# Altium PCB GTU-V1.0-20160325 .PcbDoc (part 2 of 5)
Units mil, origin at the board's own origin, x right, y up, seen from the top; angles counter-clockwise.
Board outline 6299.21 x 4330.71 mil, 4 copper layers (Top Layer, POWER, GND, Bottom Layer); 208 components, 165 nets, 695 pads, 348 vias.
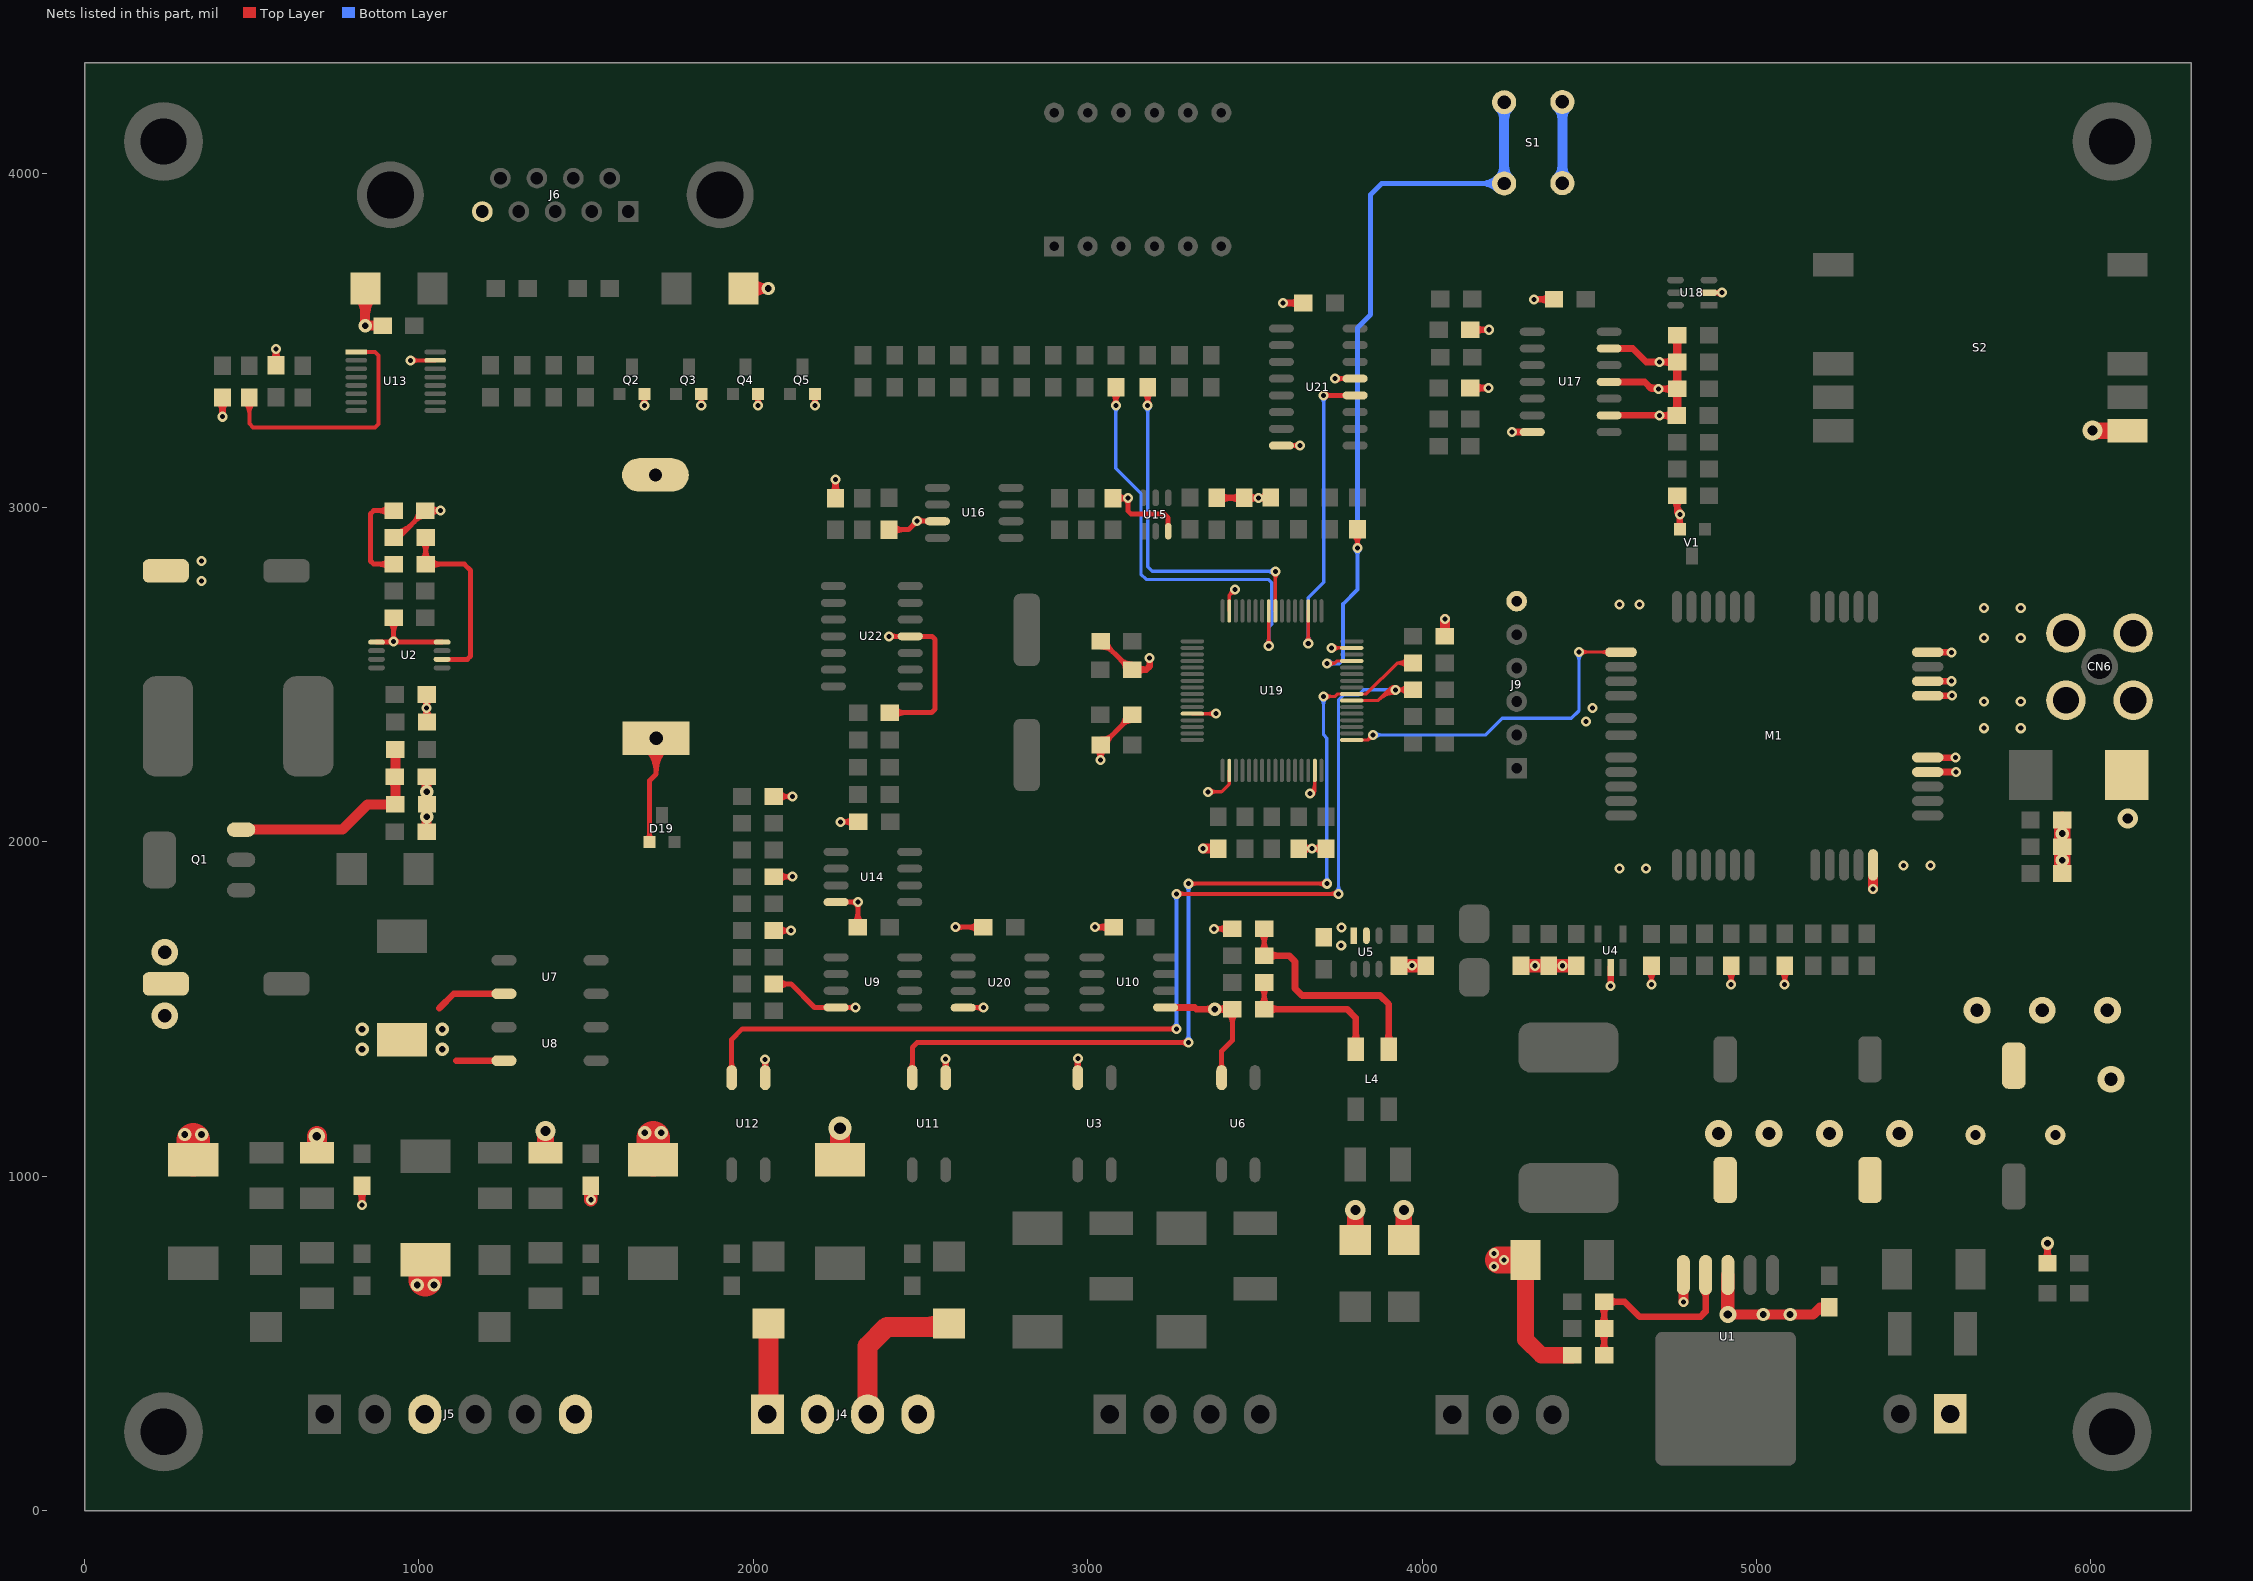
[diagram p4: the nets of this part, all layers, seen from the top]

## Via types
v1: diameter 30, hole 15, Top Layer to Bottom Layer, 262 vias
v2: diameter 40, hole 20, Top Layer to Bottom Layer, 36 vias
v3: diameter 40, hole 40, Top Layer to Bottom Layer, 16 vias
v4: diameter 80, hole 40, Top Layer to Bottom Layer, 12 vias
v5: diameter 60, hole 30, Top Layer to Bottom Layer, 11 vias
v6: diameter 50, hole 25, Top Layer to Bottom Layer, 10 vias
v7: diameter 70, hole 35, Top Layer to Bottom Layer, 1 vias

## Nets (pads, with @x,y where several pads share a name; then routed paths per layer and width w, separated by ;. In a path a pad name is that pad's centre, name@x,y a point inside that pad or via, vN(x,y) a via of type N, cw(c..) or ccw(c..) an arc to the next point about the centre after c; other vN are vias at no path point) (continued)
DIG3: R69.1 U19.56 | length 1460
  Top Layer w10: U19.56@3560.94,2690.87 v1(3560.94,2809.06) ; 3560.94,2784.91 cw(c3585.09,2784.91) 3568.02,2801.98 ccw(c3585.09,2784.91) 3560.94,2784.91 ; 3560.94,2784.91 ccw(c3536.8,2784.91) 3553.87,2801.98 cw(c3536.8,2784.91) 3560.94,2784.91
  Top Layer w15: v1(3179.21,3305.79) R69.1@3179.21,3360 ; v1@3179.21,3315.25 cw(c3221.46,3315.25) 3191.59,3345.13 ccw(c3221.46,3315.25) v1@3179.21,3315.25 ; v1@3179.21,3315.25 ccw(c3136.96,3315.25) 3166.84,3345.13 cw(c3136.96,3315.25) v1@3179.21,3315.25 ; 3179.21,3323.89 cw(c3161.11,3323.89) 3173.91,3311.09 ccw(c3161.11,3323.89) 3179.21,3323.89 ; 3179.21,3323.89 ccw(c3197.32,3323.89) 3184.52,3311.09 cw(c3197.32,3323.89) 3179.21,3323.89
  Bottom Layer w10: v1(3179.21,3305.79) 3179.21,2822.79 3192.94,2809.06 v1(3560.94,2809.06) ; 3179.21,3281.65 cw(c3203.35,3281.65) 3186.28,3298.72 ccw(c3203.35,3281.65) 3179.21,3281.65 ; 3179.21,3281.65 ccw(c3155.07,3281.65) 3172.14,3298.72 cw(c3155.07,3281.65) 3179.21,3281.65 ; 3536.8,2809.06 cw(c3536.8,2784.91) 3553.87,2801.98 ccw(c3536.8,2784.91) 3536.8,2809.06 ; 3536.8,2809.06 ccw(c3536.8,2833.2) 3553.87,2816.13 cw(c3536.8,2833.2) 3536.8,2809.06
DIG4: R74.1 U19.57 | length 1705.9
  Top Layer w10: v1(3541.26,2586.26) U19.57@3541.26,2690.87 ; 3541.26,2610.4 cw(c3517.12,2610.4) 3534.19,2593.33 ccw(c3517.12,2610.4) 3541.26,2610.4 ; 3541.26,2610.4 ccw(c3565.4,2610.4) 3548.33,2593.33 cw(c3565.4,2610.4) 3541.26,2610.4
  Top Layer w15: v1(3084.21,3305.79) R74.1@3084.21,3360 ; v1@3084.21,3315.25 cw(c3126.46,3315.25) 3096.59,3345.13 ccw(c3126.46,3315.25) v1@3084.21,3315.25 ; v1@3084.21,3315.25 ccw(c3041.96,3315.25) 3071.84,3345.13 cw(c3041.96,3315.25) v1@3084.21,3315.25 ; 3084.21,3323.89 cw(c3066.11,3323.89) 3078.91,3311.09 ccw(c3066.11,3323.89) 3084.21,3323.89 ; 3084.21,3323.89 ccw(c3102.32,3323.89) 3089.52,3311.09 cw(c3102.32,3323.89) 3084.21,3323.89
  Bottom Layer w10: v1(3084.21,3305.79) 3084.21,3116.79 3159,3042 3159,2801 3175,2785 3540,2785 3550,2775 3550,2651 3541.26,2642.26 v1(3541.26,2586.26) ; 3084.21,3281.65 cw(c3108.35,3281.65) 3091.28,3298.72 ccw(c3108.35,3281.65) 3084.21,3281.65 ; 3084.21,3281.65 ccw(c3060.07,3281.65) 3077.14,3298.72 cw(c3060.07,3281.65) 3084.21,3281.65 ; 3541.26,2610.4 cw(c3517.12,2610.4) 3534.19,2593.33 ccw(c3517.12,2610.4) 3541.26,2610.4 ; 3541.26,2610.4 ccw(c3565.4,2610.4) 3548.33,2593.33 cw(c3565.4,2610.4) 3541.26,2610.4
DIN1: D12.K J4.1 | length 310.2
  Top Layer w60: J4.1@2045.21,331.2 D12.K@2045.21,550 ; J4.1@2028.18,311.81 ccw(c1987.05,352.94) 2045.21,352.94 cw(c1987.05,352.94) J4.1@2028.18,311.81
DIN2: D11.K J4.3 | length 542.6
  Top Layer w60: J4.3@2341.76,327.76 2341.76,492.55 2399.21,550 D11.K@2585.21,550 ; 2522.36,550 ccw(c2522.36,620.36) 2572.11,570.61 cw(c2522.36,620.36) 2522.36,550
DK1: R23.1 U12.6 U19.39 | length 4461.8
  Top Layer w10: U19.39@3789.61,2422.83 3867.83,2422.83 3900,2455 ; R23.1@3972.6,2455 3900,2455 ; 3900,2455 cw(c3900,2440) 3912,2449 ccw(c3900,2440) 3900,2455 ; 3900,2455 ccw(c3900,2470) 3912,2461 cw(c3900,2470) 3900,2455 ; v1(3920,2455) ccw(c3920,2406.72) 3885.86,2440.86 cw(c3920,2406.72) v1(3920,2455) ; v1(3920,2455) ccw(c3910.15,2441.42) 3898.28,2453.28 cw(c3910.15,2441.42) v1(3920,2455) ; v1@3921.81,2455 cw(c3921.81,2406.72) 3955.96,2440.86 ccw(c3921.81,2406.72) v1@3921.81,2455 ; v1@3921.81,2455 ccw(c3921.81,2503.28) 3955.96,2469.14 cw(c3921.81,2503.28) v1@3921.81,2455 ; 3944.14,2455 cw(c3944.14,2479.14) 3927.07,2462.07 ccw(c3944.14,2479.14) 3944.14,2455 ; 3944.14,2455 ccw(c3944.14,2430.86) 3927.07,2447.93 cw(c3944.14,2430.86) 3944.14,2455 ; 3868.79,2423.79 cw(c3920,2372.57) 3920,2445 ccw(c3920,2372.57) 3868.79,2423.79 ; 3890,2445 cw(c3903.18,2431.82) 3914.13,2446.91 ccw(c3903.18,2431.82) 3890,2445 ; 3902.93,2457.93 cw(c3920,2440.86) 3920,2465 ccw(c3920,2440.86) 3902.93,2457.93
  Top Layer w12: v1(3265,1845) v1(3750,1845) ; 3286.73,1845 cw(c3286.73,1866.73) 3271.36,1851.36 ccw(c3286.73,1866.73) 3286.73,1845 ; 3286.73,1845 ccw(c3286.73,1823.27) 3271.36,1838.64 cw(c3286.73,1823.27) 3286.73,1845 ; 3728.27,1845 cw(c3728.27,1823.27) 3743.64,1838.64 ccw(c3728.27,1823.27) 3728.27,1845 ; 3728.27,1845 ccw(c3728.27,1866.73) 3743.64,1851.36 cw(c3728.27,1866.73) 3728.27,1845
  Top Layer w15: U12.6@1935.21,1295 1935.21,1409.21 1967,1441 v1(3265,1441) ; 1935.21,1337.02 cw(c1914.69,1337.02) 1929.2,1322.51 ccw(c1914.69,1337.02) 1935.21,1337.02 ; 1935.21,1337.02 ccw(c1955.73,1337.02) 1941.22,1322.51 cw(c1955.73,1337.02) 1935.21,1337.02 ; 3246.89,1441 cw(c3246.89,1422.89) 3259.7,1435.7 ccw(c3246.89,1422.89) 3246.89,1441 ; 3246.89,1441 ccw(c3246.89,1459.11) 3259.7,1446.3 cw(c3246.89,1459.11) 3246.89,1441
  Bottom Layer w10: v1(3750,1845) 3750,2425 3765,2440 3810,2440 3825,2455 v1(3920,2455) ; 3750,1869.14 cw(c3725.86,1869.14) 3742.93,1852.07 ccw(c3725.86,1869.14) 3750,1869.14 ; 3750,1869.14 ccw(c3774.14,1869.14) 3757.07,1852.07 cw(c3774.14,1869.14) 3750,1869.14 ; 3895.86,2455 cw(c3895.86,2430.86) 3912.93,2447.93 ccw(c3895.86,2430.86) 3895.86,2455 ; 3895.86,2455 ccw(c3895.86,2479.14) 3912.93,2462.07 cw(c3895.86,2479.14) 3895.86,2455
  Bottom Layer w12: v1(3265,1441) v1(3265,1845) ; 3265,1462.73 cw(c3243.27,1462.73) 3258.64,1447.36 ccw(c3243.27,1462.73) 3265,1462.73 ; 3265,1462.73 ccw(c3286.73,1462.73) 3271.36,1447.36 cw(c3286.73,1462.73) 3265,1462.73 ; 3265,1823.27 cw(c3286.73,1823.27) 3271.36,1838.64 ccw(c3286.73,1823.27) 3265,1823.27 ; 3265,1823.27 ccw(c3243.27,1823.27) 3258.64,1838.64 cw(c3243.27,1823.27) 3265,1823.27
DK2: R22.1 U11.6 U19.40 | length 3442.6
  Top Layer w10: v1(3705,2435) 3740,2435 3747.52,2442.52 3832.52,2442.52 3925,2535 ; R22.1@3972.6,2535 3925,2535 ; 3729.14,2435 cw(c3729.14,2459.14) 3712.07,2442.07 ccw(c3729.14,2459.14) 3729.14,2435 ; 3729.14,2435 ccw(c3729.14,2410.86) 3712.07,2427.93 cw(c3729.14,2410.86) 3729.14,2435 ; 3925,2535 cw(c3925,2494.16) 3955.27,2521.57 ccw(c3925,2494.16) 3925,2535 ; 3925,2535 ccw(c3925,2575.84) 3955.27,2548.43 cw(c3925,2575.84) 3925,2535
  Top Layer w12: v1(3301,1875) v1(3715,1875) ; 3322.73,1875 cw(c3322.73,1896.73) 3307.36,1881.36 ccw(c3322.73,1896.73) 3322.73,1875 ; 3322.73,1875 ccw(c3322.73,1853.27) 3307.36,1868.64 cw(c3322.73,1853.27) 3322.73,1875 ; 3693.27,1875 cw(c3693.27,1853.27) 3708.64,1868.64 ccw(c3693.27,1853.27) 3693.27,1875 ; 3693.27,1875 ccw(c3693.27,1896.73) 3708.64,1881.36 cw(c3693.27,1896.73) 3693.27,1875
  Top Layer w15: U11.6@2475.21,1295 2475.21,1385.21 2490,1400 v1(3301,1400) ; 2475.21,1337.02 cw(c2454.69,1337.02) 2469.2,1322.51 ccw(c2454.69,1337.02) 2475.21,1337.02 ; 2475.21,1337.02 ccw(c2495.73,1337.02) 2481.22,1322.51 cw(c2495.73,1337.02) 2475.21,1337.02 ; 3282.89,1400 cw(c3282.89,1381.89) 3295.7,1394.7 ccw(c3282.89,1381.89) 3282.89,1400 ; 3282.89,1400 ccw(c3282.89,1418.11) 3295.7,1405.3 cw(c3282.89,1418.11) 3282.89,1400
  Bottom Layer w10: v1(3705,2435) 3705,2320 3715,2310 v1(3715,1875) ; 3705,2410.86 cw(c3729.14,2410.86) 3712.07,2427.93 ccw(c3729.14,2410.86) 3705,2410.86 ; 3705,2410.86 ccw(c3680.86,2410.86) 3697.93,2427.93 cw(c3680.86,2410.86) 3705,2410.86 ; 3715,1899.14 cw(c3690.86,1899.14) 3707.93,1882.07 ccw(c3690.86,1899.14) 3715,1899.14 ; 3715,1899.14 ccw(c3739.14,1899.14) 3722.07,1882.07 cw(c3739.14,1899.14) 3715,1899.14
  Bottom Layer w12: v1(3301,1400) v1(3301,1875) ; 3301,1421.73 cw(c3279.27,1421.73) 3294.64,1406.36 ccw(c3279.27,1421.73) 3301,1421.73 ; 3301,1421.73 ccw(c3322.73,1421.73) 3307.36,1406.36 cw(c3322.73,1421.73) 3301,1421.73 ; 3301,1853.27 cw(c3322.73,1853.27) 3307.36,1868.64 ccw(c3322.73,1853.27) 3301,1853.27 ; 3301,1853.27 ccw(c3279.27,1853.27) 3294.64,1868.64 cw(c3279.27,1853.27) 3301,1853.27
DLC: U19.51 U21.12 | length 1237.6
  Top Layer w10: v1(3659.37,2593) U19.51@3659.37,2690.87 ; 3659.37,2617.14 cw(c3635.23,2617.14) 3652.3,2600.07 ccw(c3635.23,2617.14) 3659.37,2617.14 ; 3659.37,2617.14 ccw(c3683.51,2617.14) 3666.44,2600.07 cw(c3683.51,2617.14) 3659.37,2617.14
  Top Layer w15: v1(3705.39,3335.39) U21.12@3799.21,3335.39 ; 3723.49,3335.39 cw(c3723.49,3353.49) 3710.69,3340.69 ccw(c3723.49,3353.49) 3723.49,3335.39 ; 3723.49,3335.39 ccw(c3723.49,3317.28) 3710.69,3330.08 cw(c3723.49,3317.28) 3723.49,3335.39
  Bottom Layer w10: v1(3659.37,2593) 3659.37,2730.37 3705.39,2776.39 v1(3705.39,3335.39) ; 3659.37,2617.14 cw(c3635.23,2617.14) 3652.3,2600.07 ccw(c3635.23,2617.14) 3659.37,2617.14 ; 3659.37,2617.14 ccw(c3683.51,2617.14) 3666.44,2600.07 cw(c3683.51,2617.14) 3659.37,2617.14 ; 3705.39,3311.24 cw(c3729.53,3311.24) 3712.46,3328.31 ccw(c3729.53,3311.24) 3705.39,3311.24 ; 3705.39,3311.24 ccw(c3681.24,3311.24) 3698.31,3328.31 cw(c3681.24,3311.24) 3705.39,3311.24
GND: BT1.2 C2.2 C3.2 C5.2 C6.2 C7.2 C8.2 C9.2 C10.2 C11.2 C12.2 C13.2 C14.2 C15.2 C16.2 C17.2 C18.2 C19.1 C20.2 C22.1 C23.1 C25.2 C26.2 C27.2 C28.2 C29.2 C30.2 C31.2 C32.2 C33.2 C34.1 C35.2 C36.2 C37.2 C38.2 C39.2 C40.2 C41.2 C42.2 C43.2 C44.2 C45.2 C46.2 C47.2 C48.2 C49.2 CN6.2 CN6.3 CN6.4 CN6.5 D2.A D4.A D7.A D8.A D9.A D10.A D13.A D14.A D15.A D18.A EC1.2 EC2.2 EC3.2 EC4.2 EC5.2 EC6.2 J1.1 J4.2 J4.4 J5.3 J5.6 J6.5 J9.6 LED1.2 M1.31 M1.35 M1.36 M1.37 M1.38 M1.40 Q2.2 Q3.2 Q4.2 Q5.2 R5.2 R6.1 R7.1 R8.1 R9.1 R11.1 R18.1 R32.1 R40.1 R41.1 R49.1 R50.2 R54.1 R55.2 R58.2 R59.2 R60.1 R61.2 S1.1 S1.4 S2.4 U1.3 U1.5 U2.4 U2.5 U3.3 U4.2 U5.1 U5.2 U6.3 U7.3 U8.3 U9.4 U10.5 U11.4 U12.4 U13.15 U14.4 U15.3 U16.3 U17.7 U17.9 U17.11 U17.13 U18.2 U19.12 U19.18 U19.31 U19.47 U19.63 U20.4 U21.8 U21.13 U22.11 V1.2 | length 19976.6
  Top Layer w10: U19.12@3312.6,2383.46 v1(3383.46,2383.46) ; v1(3360,2150) 3400,2150 3423.15,2173.15 U19.18@3423.15,2213.86 ; U19.63@3423.15,2690.87 3423.15,2738.15 ; v1(3440,2755) 3423.15,2738.15 ; v1@3672.07,2137.93 ccw(c3655.21,2154.79) 3679.06,2154.79 ; U19.31@3679.06,2178.93 cw(c3631.07,2178.93) v1(3665,2145) 3679.06,2159.06 U19.31@3679.06,2213.86 ; v1@3720.31,2580.31 U19.47@3789.61,2580.31 ; 3359.32,2383.46 cw(c3359.32,2359.32) 3376.39,2376.39 ccw(c3359.32,2359.32) 3359.32,2383.46 ; 3359.32,2383.46 ccw(c3359.32,2407.61) 3376.39,2390.54 cw(c3359.32,2407.61) 3359.32,2383.46 ; 3384.14,2150 cw(c3384.14,2174.14) 3367.07,2157.07 ccw(c3384.14,2174.14) 3384.14,2150 ; 3384.14,2150 ccw(c3384.14,2125.86) 3367.07,2142.93 cw(c3384.14,2125.86) 3384.14,2150 ; 3423.15,2738.15 cw(c3439.69,2721.61) 3439.91,2745 ccw(c3439.69,2721.61) 3423.15,2738.15 ; 3423.15,2738.15 ccw(c3406.61,2754.69) 3430,2754.91 cw(c3406.61,2754.69) 3423.15,2738.15 ; 3753.46,2580.31 cw(c3753.46,2604.46) 3736.39,2587.39 ccw(c3753.46,2604.46) 3753.46,2580.31 ; 3753.46,2580.31 ccw(c3753.46,2556.17) 3736.39,2573.24 cw(c3753.46,2556.17) 3753.46,2580.31
  Top Layer w12: v1(974.21,3440) U13.15@1048.71,3440 ; 995.94,3440 cw(c995.94,3461.73) 980.58,3446.36 ccw(c995.94,3461.73) 995.94,3440 ; 995.94,3440 ccw(c995.94,3418.27) 980.58,3433.64 cw(c995.94,3418.27) 995.94,3440
  Top Layer w15: U2.5@873.21,2597.39 U2.4@1069.21,2597.39 ; R6.1@924.21,2670.61 v1(924.21,2599.39) v1@926.21,2597.39 ; C6.2@925.21,2910.61 939.21,2910.61 R9.1@1019.21,2990.61 ; v1(1674.21,3305) Q2.2@1674.21,3340 ; v1(1844.21,3305) Q3.2@1844.21,3340 ; v1(2014.21,3305) Q4.2@2014.21,3340 ; R18.1@2061.21,1575 2113,1575 2183,1505 v1(2306,1505) ; C16.2@2061.21,1735 v1(2112,1735) ; C26.2@2061.21,1896 v1(2117,1896) ; C28.2@2061.21,2136 v1(2117,2136) ; v1(2184.21,3305) Q5.2@2184.21,3340 ; U14.4@2247.6,1820 v1(2312.6,1820) C14.2@2312.6,1745 ; v1(2260,2060) C20.2@2314.21,2060 ; v1(2405,2615) 2534,2615 2543,2606 2543,2397 2532.67,2386.67 C49.2@2408.21,2386.67 ; C33.2@2405.6,2934 2464,2934 v1@2489,2959 ; v1@2482.5,2960 cw(c2464.39,2960) 2477.2,2947.2 cw(c2490,2934.39) v1@2490,2952.5 ; v1(2490,2960) 2549.6,2960 U16.3@2550.6,2959 ; v1@2495.3,2954.7 cw(c2508.11,2941.89) 2508.11,2960 cw(c2508.11,2978.11) v1@2495.3,2965.3 ; 2511.82,2960 cw(c2511.82,2945.72) U16.3@2521.92,2955.82 ; v1(2605,1745) C39.2@2687.6,1745 ; U20.4@2627.6,1504.22 v1@2689.22,1504.22 ; C45.2@3038.6,2285 C48.2@3118.6,2365 ; C44.2@3038.6,2605 C47.2@3118.6,2525 ; R41.1@3075.6,3028 v1(3120,3028) 3120,2990 3130,2980 3230,2980 3240.6,2969.4 U15.3@3240.6,2929 ; C48.2@3118.6,2370 C48.2@3132.6,2370 ; v1(3377,1740) C18.2@3432.6,1740 ; U6.3@3400.21,1295 3400.21,1374.21 3432.6,1406.6 C17.2@3432.6,1500 ; R60.1@3546.6,3029 R60.1@3547.6,3030 ; U21.8@3579.21,3185.39 v1(3634.61,3185.39) ; v1(3740,3385.39) U21.13@3799.21,3385.39 ; v1(4685.83,1573.56) R11.1@4685.83,1629.78 ; U18.2@4857.6,3642.5 v1(4896.71,3642.5) ; v1(4924.21,1573.79) R54.1@4924.21,1630 ; v1(5084.21,1573.79) R50.2@5084.21,1630 ; v1@918.91,2604.69 ccw(c906.11,2617.49) 924.21,2617.49 ; v1@918.91,2604.69 cw(c901.28,2622.32) 901.28,2597.39 ccw(c901.28,2622.32) v1@918.91,2604.69 ; v1@918.91,2604.69 ccw(c906.11,2617.49) 924.21,2617.49 ; 924.21,2617.49 ccw(c942.32,2617.49) v1@929.52,2604.69 ; 924.21,2617.49 ccw(c942.32,2617.49) v1@929.52,2604.69 ; 924.21,2628.37 cw(c966.46,2628.37) 936.59,2658.24 ccw(c966.46,2628.37) 924.21,2628.37 ; 924.21,2628.37 ccw(c881.96,2628.37) 911.84,2658.24 cw(c881.96,2628.37) 924.21,2628.37 ; v1@929.52,2604.69 ccw(c947.15,2622.32) 947.15,2597.39 cw(c947.15,2622.32) v1@929.52,2604.69 ; v1@1674.21,3314.65 cw(c1699.56,3314.65) 1681.64,3332.58 ccw(c1699.56,3314.65) v1@1674.21,3314.65 ; v1@1674.21,3314.65 ccw(c1648.86,3314.65) 1666.79,3332.58 cw(c1648.86,3314.65) v1@1674.21,3314.65 ; Q2.2@1674.21,3323.11 cw(c1656.11,3323.11) 1668.91,3310.3 ccw(c1656.11,3323.11) Q2.2@1674.21,3323.11 ; Q2.2@1674.21,3323.11 ccw(c1692.32,3323.11) 1679.52,3310.3 cw(c1692.32,3323.11) Q2.2@1674.21,3323.11 ; v1@1844.21,3314.65 cw(c1869.56,3314.65) 1851.64,3332.58 ccw(c1869.56,3314.65) v1@1844.21,3314.65 ; v1@1844.21,3314.65 ccw(c1818.86,3314.65) 1836.79,3332.58 cw(c1818.86,3314.65) v1@1844.21,3314.65 ; Q3.2@1844.21,3323.11 cw(c1826.11,3323.11) 1838.91,3310.3 ccw(c1826.11,3323.11) Q3.2@1844.21,3323.11 ; Q3.2@1844.21,3323.11 ccw(c1862.32,3323.11) 1849.52,3310.3 cw(c1862.32,3323.11) Q3.2@1844.21,3323.11 ; v1@2014.21,3314.65 cw(c2039.56,3314.65) 2021.64,3332.58 ccw(c2039.56,3314.65) v1@2014.21,3314.65 ; v1@2014.21,3314.65 ccw(c1988.86,3314.65) 2006.79,3332.58 cw(c1988.86,3314.65) v1@2014.21,3314.65 ; Q4.2@2014.21,3323.11 cw(c1996.11,3323.11) 2008.91,3310.3 ccw(c1996.11,3323.11) Q4.2@2014.21,3323.11 ; Q4.2@2014.21,3323.11 ccw(c2032.32,3323.11) 2019.52,3310.3 cw(c2032.32,3323.11) Q4.2@2014.21,3323.11 ; 2093.89,1735 cw(c2093.89,1716.89) 2106.7,1729.7 ccw(c2093.89,1716.89) 2093.89,1735 ; 2093.89,1735 ccw(c2093.89,1753.11) 2106.7,1740.3 cw(c2093.89,1753.11) 2093.89,1735 ; 2098.89,1896 cw(c2098.89,1877.89) 2111.7,1890.7 ccw(c2098.89,1877.89) 2098.89,1896 ; 2098.89,1896 ccw(c2098.89,1914.11) 2111.7,1901.3 cw(c2098.89,1914.11) 2098.89,1896 ; 2098.89,2136 cw(c2098.89,2117.89) 2111.7,2130.7 ccw(c2098.89,2117.89) 2098.89,2136 ; 2098.89,2136 ccw(c2098.89,2154.11) 2111.7,2141.3 cw(c2098.89,2154.11) 2098.89,2136 ; 2105.96,1575 cw(c2105.96,1617.25) 2076.09,1587.37 ccw(c2105.96,1617.25) 2105.96,1575 ; 2105.96,1575 ccw(c2105.96,1532.75) 2076.09,1562.63 cw(c2105.96,1532.75) 2105.96,1575 ; v1@2105.96,1735 cw(c2105.96,1777.25) 2076.09,1747.37 ccw(c2105.96,1777.25) v1@2105.96,1735 ; v1@2105.96,1735 ccw(c2105.96,1692.75) 2076.09,1722.63 cw(c2105.96,1692.75) v1@2105.96,1735 ; v1@2105.96,1896 cw(c2105.96,1938.25) 2076.09,1908.37 ccw(c2105.96,1938.25) v1@2105.96,1896 ; v1@2105.96,1896 ccw(c2105.96,1853.75) 2076.09,1883.63 cw(c2105.96,1853.75) v1@2105.96,1896 ; v1@2105.96,2136 cw(c2105.96,2178.25) 2076.09,2148.37 ccw(c2105.96,2178.25) v1@2105.96,2136 ; v1@2105.96,2136 ccw(c2105.96,2093.75) 2076.09,2123.63 cw(c2105.96,2093.75) v1@2105.96,2136 ; v1@2184.21,3314.65 cw(c2209.56,3314.65) 2191.64,3332.58 ccw(c2209.56,3314.65) v1@2184.21,3314.65 ; v1@2184.21,3314.65 ccw(c2158.86,3314.65) 2176.79,3332.58 cw(c2158.86,3314.65) v1@2184.21,3314.65 ; Q5.2@2184.21,3323.11 cw(c2166.11,3323.11) 2178.91,3310.3 ccw(c2166.11,3323.11) Q5.2@2184.21,3323.11 ; Q5.2@2184.21,3323.11 ccw(c2202.32,3323.11) 2189.52,3310.3 cw(c2202.32,3323.11) Q5.2@2184.21,3323.11 ; v1@2269.46,2060 cw(c2269.46,2017.75) 2299.34,2047.63 ccw(c2269.46,2017.75) v1@2269.46,2060 ; v1@2269.46,2060 ccw(c2269.46,2102.25) 2299.34,2072.37 cw(c2269.46,2102.25) v1@2269.46,2060 ; 2278.11,2060 cw(c2278.11,2078.11) 2265.3,2065.3 ccw(c2278.11,2078.11) 2278.11,2060 ; 2278.11,2060 ccw(c2278.11,2041.89) 2265.3,2054.7 cw(c2278.11,2041.89) 2278.11,2060 ; 2287.89,1505 cw(c2287.89,1486.89) 2300.7,1499.7 ccw(c2287.89,1486.89) 2287.89,1505 ; 2287.89,1505 ccw(c2287.89,1523.11) 2300.7,1510.3 cw(c2287.89,1523.11) 2287.89,1505 ; 2294.49,1820 cw(c2294.49,1801.89) v1@2307.3,1814.7 ; 2294.49,1820 ccw(c2294.49,1838.11) 2307.3,1825.3 cw(c2294.49,1838.11) 2294.49,1820 ; 2294.49,1820 cw(c2294.49,1801.89) v1@2307.3,1814.7 ; v1@2307.3,1814.7 cw(c2294.49,1801.89) 2312.6,1801.89 ; v1@2307.3,1814.7 cw(c2294.49,1801.89) 2312.6,1801.89 ; 2312.6,1787.25 cw(c2270.35,1787.25) 2300.22,1757.37 ccw(c2270.35,1787.25) 2312.6,1787.25 ; 2312.6,1787.25 ccw(c2354.85,1787.25) 2324.97,1757.37 cw(c2354.85,1787.25) 2312.6,1787.25 ; 2312.6,1801.89 cw(c2330.7,1801.89) 2317.9,1814.7 ccw(c2330.7,1801.89) 2312.6,1801.89 ; 2423.11,2615 cw(c2423.11,2633.11) 2410.3,2620.3 ccw(c2423.11,2633.11) 2423.11,2615 ; 2423.11,2615 ccw(c2423.11,2596.89) 2410.3,2609.7 cw(c2423.11,2596.89) 2423.11,2615 ; 2447.85,2934 cw(c2447.85,2976.25) 2417.97,2946.37 ccw(c2447.85,2976.25) 2447.85,2934 ; 2447.85,2934 ccw(c2447.85,2891.75) 2417.97,2921.63 cw(c2447.85,2891.75) 2447.85,2934 ; 2452.96,2386.67 cw(c2452.96,2428.92) 2423.09,2399.04 ccw(c2452.96,2428.92) 2452.96,2386.67 ; 2452.96,2386.67 ccw(c2452.96,2344.42) 2423.09,2374.29 cw(c2452.96,2344.42) 2452.96,2386.67 ; 2623.11,1745 cw(c2623.11,1763.11) 2610.3,1750.3 ccw(c2623.11,1763.11) 2623.11,1745 ; 2623.11,1745 ccw(c2623.11,1726.89) 2610.3,1739.7 cw(c2623.11,1726.89) 2623.11,1745 ; 2642.85,1745 cw(c2642.85,1702.75) 2672.72,1732.63 ccw(c2642.85,1702.75) 2642.85,1745 ; 2642.85,1745 ccw(c2642.85,1787.25) 2672.72,1757.37 cw(c2642.85,1787.25) 2642.85,1745 ; 2670.11,1504.22 cw(c2670.11,1486.11) 2682.92,1498.92 ccw(c2670.11,1486.11) 2670.11,1504.22 ; 2670.11,1504.22 ccw(c2670.11,1522.33) 2682.92,1509.52 cw(c2670.11,1522.33) 2670.11,1504.22 ; 3101.89,3028 cw(c3101.89,3009.89) v1@3114.7,3022.7 ; 3101.89,3028 ccw(c3101.89,3046.11) 3114.7,3033.3 cw(c3101.89,3046.11) 3101.89,3028 ; 3101.89,3028 cw(c3101.89,3009.89) v1@3114.7,3022.7 ; v1@3114.7,3022.7 cw(c3101.89,3009.89) 3120,3009.89 ; v1@3114.7,3022.7 cw(c3101.89,3009.89) 3120,3009.89 ; v1@3117.85,3028 cw(c3117.85,3070.25) 3087.97,3040.37 ccw(c3117.85,3070.25) v1@3117.85,3028 ; v1@3117.85,3028 ccw(c3117.85,2985.75) 3087.97,3015.63 cw(c3117.85,2985.75) v1@3117.85,3028 ; 3120,3009.89 cw(c3138.11,3009.89) 3125.3,3022.7 ccw(c3138.11,3009.89) 3120,3009.89 ; v1@3387.85,1740 cw(c3387.85,1697.75) 3417.72,1727.63 ccw(c3387.85,1697.75) v1@3387.85,1740 ; v1@3387.85,1740 ccw(c3387.85,1782.25) 3417.72,1752.37 cw(c3387.85,1782.25) v1@3387.85,1740 ; 3395.11,1740 cw(c3395.11,1758.11) 3382.3,1745.3 ccw(c3395.11,1758.11) 3395.11,1740 ; 3395.11,1740 ccw(c3395.11,1721.89) 3382.3,1734.7 cw(c3395.11,1721.89) 3395.11,1740 ; 3400.21,1337.02 cw(c3379.69,1337.02) 3394.2,1322.51 ccw(c3379.69,1337.02) 3400.21,1337.02 ; 3400.21,1337.02 ccw(c3420.73,1337.02) 3406.22,1322.51 cw(c3420.73,1337.02) 3400.21,1337.02 ; 3432.6,1457.75 cw(c3474.85,1457.75) 3444.97,1487.63 ccw(c3474.85,1457.75) 3432.6,1457.75 ; 3432.6,1457.75 ccw(c3390.35,1457.75) 3420.22,1487.63 cw(c3390.35,1457.75) 3432.6,1457.75 ; U21.8@3616.51,3185.39 cw(c3616.51,3167.28) 3629.31,3180.08 ccw(c3616.51,3167.28) U21.8@3616.51,3185.39 ; U21.8@3616.51,3185.39 ccw(c3616.51,3203.49) 3629.31,3190.69 cw(c3616.51,3203.49) U21.8@3616.51,3185.39 ; 3758.11,3385.39 cw(c3758.11,3403.49) 3745.3,3390.69 ccw(c3758.11,3403.49) 3758.11,3385.39 ; 3758.11,3385.39 ccw(c3758.11,3367.28) 3745.3,3380.08 cw(c3758.11,3367.28) 3758.11,3385.39 ; v1@4685.83,1585.03 cw(c4728.08,1585.03) 4698.2,1614.9 ccw(c4728.08,1585.03) v1@4685.83,1585.03 ; v1@4685.83,1585.03 ccw(c4643.58,1585.03) 4673.45,1614.9 cw(c4643.58,1585.03) v1@4685.83,1585.03 ; 4685.83,1591.67 cw(c4667.72,1591.67) 4680.52,1578.87 ccw(c4667.72,1591.67) 4685.83,1591.67 ; 4685.83,1591.67 ccw(c4703.93,1591.67) 4691.13,1578.87 cw(c4703.93,1591.67) 4685.83,1591.67 ; U18.2@4878.61,3642.5 cw(c4878.61,3624.39) 4891.41,3637.2 ccw(c4878.61,3624.39) U18.2@4878.61,3642.5 ; U18.2@4878.61,3642.5 ccw(c4878.61,3660.61) 4891.41,3647.8 cw(c4878.61,3660.61) U18.2@4878.61,3642.5 ; v1@4924.21,1585.25 cw(c4966.46,1585.25) 4936.59,1615.13 ccw(c4966.46,1585.25) v1@4924.21,1585.25 ; v1@4924.21,1585.25 ccw(c4881.96,1585.25) 4911.84,1615.13 cw(c4881.96,1585.25) v1@4924.21,1585.25 ; 4924.21,1591.89 cw(c4906.11,1591.89) 4918.91,1579.09 ccw(c4906.11,1591.89) 4924.21,1591.89 ; 4924.21,1591.89 ccw(c4942.32,1591.89) 4929.52,1579.09 cw(c4942.32,1591.89) 4924.21,1591.89 ; v1@5084.21,1585.25 cw(c5126.46,1585.25) 5096.59,1615.13 ccw(c5126.46,1585.25) v1@5084.21,1585.25 ; v1@5084.21,1585.25 ccw(c5041.96,1585.25) 5071.84,1615.13 cw(c5041.96,1585.25) v1@5084.21,1585.25 ; 5084.21,1591.89 cw(c5066.11,1591.89) 5078.91,1579.09 ccw(c5066.11,1591.89) 5084.21,1591.89 ; 5084.21,1591.89 ccw(c5102.32,1591.89) 5089.52,1579.09 cw(c5102.32,1591.89) 5084.21,1591.89 ; C6.2@927.71,2913.11 ccw(c927.71,2946.91) 951.61,2923.01 cw(c927.71,2946.91) C6.2@927.71,2913.11 ; C6.2@927.71,2928.11 ccw(c927.71,2998.13) 977.22,2948.62 cw(c927.71,2998.13) C6.2@927.71,2928.11 ; 985.07,2956.47 ccw(c950.93,2990.61) 999.21,2990.61 cw(c950.93,2990.61) 985.07,2956.47 ; 991.11,2962.51 cw(c1016.71,2936.9) 1016.71,2973.11 ccw(c1016.71,2936.9) 991.11,2962.51 ; C45.2@3041.1,2307.5 ccw(c3041.1,2355.78) 3075.24,2321.64 cw(c3041.1,2355.78) C45.2@3041.1,2307.5 ; C44.2@3041.1,2582.5 cw(c3041.1,2534.22) 3075.24,2568.36 ccw(c3041.1,2534.22) C44.2@3041.1,2582.5 ; C45.2@3058.6,2290 cw(c3094.81,2290) 3069.21,2315.61 ccw(c3094.81,2290) C45.2@3058.6,2290 ; C44.2@3058.6,2600 ccw(c3094.81,2600) 3069.21,2574.39 cw(c3094.81,2600) C44.2@3058.6,2600 ; 3097.66,2545.94 ccw(c3130.1,2578.37) 3130.1,2532.5 cw(c3130.1,2578.37) 3097.66,2545.94 ; 3097.75,2344.15 ccw(c3061.9,2380) 3112.6,2380 cw(c3061.9,2380) 3097.75,2344.15 ; 3101.28,2542.31 cw(c3073.97,2515) 3112.6,2515 ccw(c3073.97,2515) 3101.28,2542.31 ; 3106.2,2352.6 cw(c3130.1,2328.7) 3130.1,2362.5 ccw(c3130.1,2328.7) 3106.2,2352.6
  Top Layer w20: v1(412.71,3271.5) C22.1@412.71,3329 ; C23.1@572.71,3425 v1(572.71,3473.5) ; v1(830,914.21) C25.2@830,972 ; R9.1@1019.21,2990.61 v1(1065,2990.61) ; C2.2@1023.21,2440.61 1023.21,2359.61 R7.1@1024.21,2358.61 ; 1061,1503 1104,1546 U7.3@1254.21,1546 ; 1112,1346 U8.3@1254.21,1346 ; U12.4@2035.21,1295 v1(2035.21,1350) ; R49.1@2245.6,3028 v1(2245.6,3084.4) ; U11.4@2575.21,1295 v1(2575.21,1351) ; U3.3@2970.21,1295 v1(2970.21,1353) ; v1@3020,1745 C15.2@3077.6,1745 ; v1(3038.6,2245.6) C45.2@3038.6,2290 ; C47.2@3132.6,2515 3175,2515 3185,2525 v1(3185,2550) ; U10.5@3232.6,1505 3320,1505 3325,1500 C17.2@3432.6,1500 C17.2@3427.6,1505 ; C32.2@3385.6,3029 R60.1@3546.6,3029 ; v1(3583.39,3611.61) C46.2@3644.21,3611.61 ; R61.2@3631.35,1980 C41.2@3712.6,1980 ; R58.2@4144.21,3357.61 v1(4198.21,3357.61) ; R59.2@4144.21,3531.61 v1(4199.21,3531.61) ; v1(4268.6,3225.61) U17.7@4329.21,3225.61 ; v1(4334.6,3622.61) C38.2@4394.21,3622.61 ; U17.9@4559.21,3275.61 4708.6,3275.61 v1(4709.21,3275) C34.1@4761.6,3275 C34.1@4762.6,3276 ; U17.11@4559.21,3375.61 4665.6,3375.61 4686.21,3355 C37.2@4762.6,3355 ; U17.13@4559.21,3475.61 4629.6,3475.61 4670.21,3435 C35.2@4762.6,3435 ; v1(4563.83,1569.17) U4.2@4563.83,1624.78 ; 4762.6,3010 ccw(c4801.98,3010) v1@4774.13,2982.15 ; R55.2@4762.6,3035 4762.6,2986.61 v1(4770.6,2978.61) V1.2@4770.6,2935 ; U1.5@4780.93,705 U1.5@4781.21,704.72 ; M1.35@5511.98,2208.91 5595.91,2208.91 v1(5596,2209) ; M1.36@5511.98,2252.21 5594.43,2252.21 v1(5595.21,2253) ; M1.37@5511.98,2437.25 v1(5584.21,2437.25) ; M1.38@5511.98,2480.56 v1(5583.21,2480.56) ; M1.40@5511.98,2567.17 v1(5582.21,2567.17) ; LED1.2@5870,740 v2(5870,800) ; 412.71,3290.29 cw(c448.93,3290.29) 423.32,3315.89 ccw(c448.93,3290.29) 412.71,3290.29 ; 412.71,3290.29 ccw(c376.5,3290.29) 402.11,3315.89 cw(c376.5,3290.29) 412.71,3290.29 ; v1@572.71,3463.71 cw(c536.5,3463.71) 562.11,3438.11 ccw(c536.5,3463.71) v1@572.71,3463.71 ; v1@572.71,3463.71 ccw(c608.93,3463.71) 583.32,3438.11 cw(c608.93,3463.71) v1@572.71,3463.71 ; 830,933.29 cw(c866.21,933.29) 840.61,958.89 ccw(c866.21,933.29) 830,933.29 ; 830,933.29 ccw(c793.79,933.29) 819.39,958.89 cw(c793.79,933.29) 830,933.29 ; v1@1023.21,2404.4 cw(c1059.43,2404.4) 1033.82,2430.01 ccw(c1059.43,2404.4) v1@1023.21,2404.4 ; v1@1023.21,2404.4 ccw(c987,2404.4) 1012.61,2430.01 cw(c987,2404.4) v1@1023.21,2404.4 ; v1@1057.93,2990.61 cw(c1057.93,3026.83) 1032.32,3001.22 ccw(c1057.93,3026.83) v1@1057.93,2990.61 ; v1@1057.93,2990.61 ccw(c1057.93,2954.4) 1032.32,2980.01 cw(c1057.93,2954.4) v1@1057.93,2990.61 ; 2245.6,3066.71 cw(c2209.39,3066.71) 2234.99,3041.11 ccw(c2209.39,3066.71) 2245.6,3066.71 ; 2245.6,3066.71 ccw(c2281.81,3066.71) 2256.21,3041.11 cw(c2281.81,3066.71) 2245.6,3066.71 ; v1@3038.6,2253.79 cw(c3074.81,2253.79) 3049.21,2279.39 ccw(c3074.81,2253.79) v1@3038.6,2253.79 ; v1@3038.6,2253.79 ccw(c3002.39,2253.79) 3027.99,2279.39 cw(c3002.39,2253.79) v1@3038.6,2253.79 ; 3038.89,1745 cw(c3038.89,1708.79) 3064.49,1734.39 ccw(c3038.89,1708.79) 3038.89,1745 ; 3038.89,1745 ccw(c3038.89,1781.21) 3064.49,1755.61 cw(c3038.89,1781.21) 3038.89,1745 ; 3171.31,2515 cw(c3171.31,2551.21) 3145.71,2525.61 ccw(c3171.31,2551.21) 3171.31,2515 ; 3171.31,2515 ccw(c3171.31,2478.79) 3145.71,2504.39 cw(c3171.31,2478.79) 3171.31,2515 ; 3355.86,1500 cw(c3355.86,1475.86) 3372.93,1492.93 ccw(c3355.86,1475.86) 3355.86,1500 ; 3355.86,1500 ccw(c3355.86,1524.14) 3372.93,1507.07 cw(c3355.86,1524.14) 3355.86,1500 ; v2@3393.89,1500 cw(c3393.89,1463.79) 3419.49,1489.39 ccw(c3393.89,1463.79) v2@3393.89,1500 ; v2@3393.89,1500 ccw(c3393.89,1536.21) 3419.49,1510.61 cw(c3393.89,1536.21) v2@3393.89,1500 ; 3404.14,1500 cw(c3404.14,1524.14) 3387.07,1507.07 ccw(c3404.14,1524.14) 3404.14,1500 ; 3404.14,1500 ccw(c3404.14,1475.86) 3387.07,1492.93 cw(c3404.14,1475.86) 3404.14,1500 ; 3421.81,3029 cw(c3421.81,3065.21) 3396.21,3039.61 ccw(c3421.81,3065.21) 3421.81,3029 ; 3421.81,3029 ccw(c3421.81,2992.79) 3396.21,3018.39 cw(c3421.81,2992.79) 3421.81,3029 ; 3431.39,3029 cw(c3431.39,2992.79) 3456.99,3018.39 ccw(c3431.39,2992.79) 3431.39,3029 ; 3431.39,3029 ccw(c3431.39,3065.21) 3456.99,3039.61 cw(c3431.39,3065.21) 3431.39,3029 ; v1@3503.81,3029 cw(c3503.81,3065.21) 3478.21,3039.61 ccw(c3503.81,3065.21) v1@3503.81,3029 ; v1@3503.81,3029 ccw(c3503.81,2992.79) 3478.21,3018.39 cw(c3503.81,2992.79) v1@3503.81,3029 ; 3605.5,3611.61 cw(c3605.5,3575.4) 3631.11,3601.01 ccw(c3605.5,3575.4) 3605.5,3611.61 ; 3605.5,3611.61 ccw(c3605.5,3647.83) 3631.11,3622.22 cw(c3605.5,3647.83) 3605.5,3611.61 ; v1@3667.56,1980 cw(c3667.56,2016.21) 3641.96,1990.61 ccw(c3667.56,2016.21) v1@3667.56,1980 ; v1@3667.56,1980 ccw(c3667.56,1943.79) 3641.96,1969.39 cw(c3667.56,1943.79) v1@3667.56,1980 ; v1@3676.39,1980 cw(c3676.39,1943.79) 3701.99,1969.39 ccw(c3676.39,1943.79) v1@3676.39,1980 ; v1@3676.39,1980 ccw(c3676.39,2016.21) 3701.99,1990.61 cw(c3676.39,2016.21) v1@3676.39,1980 ; 4182.93,3357.61 cw(c4182.93,3393.83) 4157.32,3368.22 ccw(c4182.93,3393.83) 4182.93,3357.61 ; 4182.93,3357.61 ccw(c4182.93,3321.4) 4157.32,3347.01 cw(c4182.93,3321.4) 4182.93,3357.61 ; 4182.93,3531.61 cw(c4182.93,3567.83) 4157.32,3542.22 ccw(c4182.93,3567.83) 4182.93,3531.61 ; 4182.93,3531.61 ccw(c4182.93,3495.4) 4157.32,3521.01 cw(c4182.93,3495.4) 4182.93,3531.61 ; 4355.5,3622.61 cw(c4355.5,3586.4) 4381.11,3612.01 ccw(c4355.5,3586.4) 4355.5,3622.61 ; 4355.5,3622.61 ccw(c4355.5,3658.83) 4381.11,3633.22 cw(c4355.5,3658.83) 4355.5,3622.61 ; v1@4722.89,3275 cw(c4722.89,3238.79) 4748.49,3264.39 ccw(c4722.89,3238.79) v1@4722.89,3275 ; v1@4722.89,3275 ccw(c4722.89,3311.21) 4748.49,3285.61 cw(c4722.89,3311.21) v1@4722.89,3275 ; 4723.89,3355 cw(c4723.89,3318.79) 4749.49,3344.39 ccw(c4723.89,3318.79) 4723.89,3355 ; 4723.89,3355 ccw(c4723.89,3391.21) 4749.49,3365.61 cw(c4723.89,3391.21) 4723.89,3355 ; v1@4723.89,3435 cw(c4723.89,3398.79) 4749.49,3424.39 ccw(c4723.89,3398.79) v1@4723.89,3435 ; v1@4723.89,3435 ccw(c4723.89,3471.21) 4749.49,3445.61 cw(c4723.89,3471.21) v1@4723.89,3435 ; 4762.6,2998.79 cw(c4798.81,2998.79) 4773.21,3024.39 ccw(c4798.81,2998.79) 4762.6,2998.79 ; 4762.6,2998.79 ccw(c4726.39,2998.79) 4751.99,3024.39 cw(c4726.39,2998.79) 4762.6,2998.79 ; 4770.6,2954.31 cw(c4751.28,2954.31) 4764.94,2940.66 ccw(c4751.28,2954.31) 4770.6,2954.31 ; 4770.6,2954.31 ccw(c4789.91,2954.31) 4776.26,2940.66 cw(c4789.91,2954.31) 4770.6,2954.31 ; 5870,775.86 cw(c5894.14,775.86) 5877.07,792.93 ccw(c5894.14,775.86) 5870,775.86 ; 5870,775.86 ccw(c5845.86,775.86) 5862.93,792.93 cw(c5845.86,775.86) 5870,775.86 ; 5870,776.21 cw(c5833.79,776.21) 5859.39,750.61 ccw(c5833.79,776.21) 5870,776.21 ; 5870,776.21 ccw(c5906.21,776.21) 5880.61,750.61 cw(c5906.21,776.21) 5870,776.21 ; R7.1@1013.61,2369.22 ccw(c990.41,2392.41) 1023.21,2392.41 cw(c990.41,2392.41) R7.1@1013.61,2369.22 ; v1@1023.21,2397.24 ccw(c1062.84,2397.24) 1034.82,2369.22 cw(c1062.84,2397.24) v1@1023.21,2397.24 ; v1@3508.97,3029 ccw(c3508.97,3068.63) 3536.99,3040.61 cw(c3508.97,3068.63) v1@3508.97,3029 ; v1@3513.8,3029 cw(c3513.8,2996.2) 3536.99,3019.39 ccw(c3513.8,2996.2) v1@3513.8,3029 ; 4676.1,3365.11 ccw(c4694.72,3383.73) 4705.22,3359.59 cw(c4694.72,3383.73) 4676.1,3365.11
  Top Layer w25: C34.1@4762.6,3276 C36.2@4762.6,3515 ; 4762.6,3324.82 cw(c4792.78,3324.82) 4771.44,3346.16 ccw(c4792.78,3324.82) 4762.6,3324.82 ; 4762.6,3324.82 ccw(c4732.42,3324.82) 4753.76,3346.16 cw(c4732.42,3324.82) 4762.6,3324.82 ; 4762.6,3385.18 cw(c4732.42,3385.18) 4753.76,3363.84 ccw(c4732.42,3385.18) 4762.6,3385.18 ; 4762.6,3385.18 ccw(c4792.78,3385.18) 4771.44,3363.84 cw(c4792.78,3385.18) 4762.6,3385.18 ; 4762.6,3404.82 cw(c4792.78,3404.82) 4771.44,3426.16 ccw(c4792.78,3404.82) 4762.6,3404.82 ; 4762.6,3404.82 ccw(c4732.42,3404.82) 4753.76,3426.16 cw(c4732.42,3404.82) 4762.6,3404.82 ; 4762.6,3465.18 cw(c4732.42,3465.18) 4753.76,3443.84 ccw(c4732.42,3465.18) 4762.6,3465.18 ; 4762.6,3465.18 ccw(c4792.78,3465.18) 4771.44,3443.84 cw(c4792.78,3465.18) 4762.6,3465.18 ; 4762.6,3484.82 cw(c4792.78,3484.82) 4771.44,3506.16 ccw(c4792.78,3484.82) 4762.6,3484.82 ; 4762.6,3484.82 ccw(c4732.42,3484.82) 4753.76,3506.16 cw(c4732.42,3484.82) 4762.6,3484.82 ; C34.1@4752.76,3283.84 ccw(c4729.01,3307.59) 4762.6,3307.59 cw(c4729.01,3307.59) C34.1@4752.76,3283.84 ; 4762.6,3302.76 ccw(c4789.36,3302.76) 4770.44,3283.84 cw(c4789.36,3302.76) 4762.6,3302.76
  Top Layer w30: D14.A@840.21,3655 839.21,3654 v2(839.21,3544) C19.1@891.21,3544 ; C5.2@1023.21,2030.61 C7.2@1023.21,2194.61 ; D15.A@1970.21,3655 v2(2044.21,3655) ; v1(3345,1980) C40.2@3390,1980 ; C42.2@4067.6,2615 v1(4067.6,2666) ; v1(4781.21,624) U1.5@4781.21,704.72 ; v6(4914.27,586.95) 5169.16,586.95 5190.21,608 C3.2@5217.6,608 ; v1(5348.6,1859.39) M1.31@5348.6,1931.35 ; v2@2042.64,3655 cw(c2042.64,3727.43) 1991.43,3676.21 ccw(c2042.64,3727.43) v2@2042.64,3655 ; v2@2042.64,3655 ccw(c2042.64,3582.57) 1991.43,3633.79 cw(c2042.64,3582.57) v2@2042.64,3655 ; D14.A@819,3631.29 cw(c770.2,3582.49) 839.21,3582.49 ccw(c770.2,3582.49) D14.A@819,3631.29 ; 839.21,3577.66 cw(c915.05,3577.66) 861.43,3631.29 ccw(c915.05,3577.66) 839.21,3577.66 ; v2@1023.21,2086.06 cw(c1050.77,2086.06) 1031.28,2105.54 ccw(c1050.77,2086.06) v2@1023.21,2086.06 ; v2@1023.21,2139.17 ccw(c1050.77,2139.17) 1031.28,2119.69 cw(c1050.77,2139.17) v2@1023.21,2139.17 ; 5176.52,594.31 cw(c5197.89,572.94) 5212.7,599.28 ccw(c5197.89,572.94) 5176.52,594.31
  Top Layer w40: v1@1513.6,930 C27.2@1513.6,972 ; C8.2@3930.83,1629.78 C9.2@4010.83,1629.78 ; C11.2@4295.83,1629.78 C13.2@4460.83,1629.78 ; v6(4914.27,586.95) U1.3@4914.27,705
  Top Layer w50: R40.1@1378.4,1070 v5(1378.4,1135.81) ; D9.A@3785.86,824.14 ccw(c3751.72,858.28) 3800,858.28 ccw(c3848.28,858.28) D9.A@3814.14,824.14 ; D9.A@3800,810 v5(3800,900) ; D10.A@3930.86,824.14 ccw(c3896.72,858.28) 3945,858.28 ccw(c3993.28,858.28) D10.A@3959.14,824.14 ; D10.A@3945,810 v5(3945,900) ; D2.A@4309.21,750 4309.21,512 4356.21,465 R5.2@4449.21,465 ; C31.2@5914.21,1905.39 C29.2@5914.21,2065.39 ; v5(6004.21,3230) S2.4@6109.21,3230 ; 4309.21,687.16 cw(c4356.74,687.16) 4323.13,720.77 ccw(c4356.74,687.16) 4309.21,687.16 ; 4309.21,687.16 ccw(c4261.69,687.16) 4295.29,720.77 cw(c4261.69,687.16) 4309.21,687.16
  Top Layer w60: R32.1@694.8,1070 v6(694.8,1120) ; D8.A@2259.21,1055 v7(2259.21,1144)
  Top Layer w80: 4227.5,750 D2.A@4309.21,750
  Top Layer w100: D13.A@325.21,1050 325.21,1110 ; 1019.21,690 D7.A@1019.21,750 ; D18.A@1700.21,1050 1700.21,1115
  Bottom Layer w30: S1.1@4404.36,3984.85 ccw(c4368.51,4020.7) 4419.21,4020.7 ccw(c4469.91,4020.7) S1.1@4434.06,3984.85 ; S1.4@4404.36,4198.15 cw(c4368.51,4162.3) 4419.21,4162.3 cw(c4469.91,4162.3) S1.4@4434.06,4198.15 ; S1.1@4419.21,3970 S1.4@4419.21,4213
  other v1: 4215,730 4245,750 4215,770 1515,930 2688.22,1504.22 3970,1630 4338,1629.78 4420,1629.78 3758,1691 3759,1744 3022,1745 4590,1920 4670,1920 5440,1930 5520,1930 3670,1980 5680,2340 5790,2340 4490,2360 1023.21,2400 4510,2400 5680,2420 5790,2420 3729.31,2580.31 5680,2610 5790,2610 5680,2700 5790,2700 4590,2710 4650,2710 350,2780 350,2840 3510,3029 4707.21,3355 4709.21,3435
  other v2: 5020.21,586.95 5100.21,586.95 995,675 1045,675 300,1125 350,1125 1675,1130 1725,1130 830,1380 1070,1380 830,1440 1070,1440 3380,1500 5914.21,1945 5914.21,2025 1023.21,2075 1023.21,2150
  other v4: 4886.21,1128 5037.21,1128 5218.21,1128 5427.21,1128 6060,1290 240,1480 5659,1497 5854.11,1497 6049.21,1497 240,1670
  other v5: 5654.21,1124 5893.21,1124 6110,2070
KEY: R30.1 S1.2 S1.3 U19.45 | length 3112.9
  Top Layer w10: v1(3716,2534) 3738.06,2534 ; U19.45@3789.61,2540.94 3745,2540.94 3738.06,2534 ; 3738.05,2534 cw(c3738.05,2553.32) 3723.52,2540.59 ccw(c3738.05,2553.32) 3738.05,2534 ; 3738.05,2534 ccw(c3738.05,2514.68) 3723.52,2527.41 cw(c3738.05,2514.68) 3738.05,2534
  Top Layer w12: v1(3806.35,2878.35) R30.1@3806.35,2935 ; v1@3806.35,2886.63 cw(c3852.22,2886.63) 3819.78,2919.06 ccw(c3852.22,2886.63) v1@3806.35,2886.63 ; v1@3806.35,2886.63 ccw(c3760.48,2886.63) 3792.91,2919.06 cw(c3760.48,2886.63) v1@3806.35,2886.63 ; 3806.35,2900.08 cw(c3784.62,2900.08) 3799.98,2884.71 ccw(c3784.62,2900.08) 3806.35,2900.08 ; 3806.35,2900.08 ccw(c3828.08,2900.08) 3812.71,2884.71 cw(c3828.08,2900.08) 3806.35,2900.08
  Bottom Layer w12: v1(3716,2534) 3752,2534 3764,2546 3764,2712 3806.35,2754.35 v1(3806.35,2878.35) ; 3737.73,2534 cw(c3737.73,2555.73) 3722.36,2540.36 ccw(c3737.73,2555.73) 3737.73,2534 ; 3737.73,2534 ccw(c3737.73,2512.27) 3722.36,2527.64 cw(c3737.73,2512.27) 3737.73,2534 ; 3806.35,2856.62 cw(c3828.08,2856.62) 3812.71,2871.98 ccw(c3828.08,2856.62) 3806.35,2856.62 ; 3806.35,2856.62 ccw(c3784.62,2856.62) 3799.98,2871.98 cw(c3784.62,2856.62) 3806.35,2856.62
  Bottom Layer w15: v1(3806.35,2878.35) 3806.35,3537.35 3846,3577 3846,3936 3879,3969 S1.2@4245.21,3969 ; 3806.35,2896.45 cw(c3788.24,2896.45) 3801.05,2883.65 ccw(c3788.24,2896.45) 3806.35,2896.45 ; 3806.35,2896.45 ccw(c3824.45,2896.45) 3811.65,2883.65 cw(c3824.45,2896.45) 3806.35,2896.45 ; 4176.41,3969 cw(c4176.41,3900.19) 4225.06,3948.85 ccw(c4176.41,3900.19) 4176.41,3969 ; 4176.41,3969 ccw(c4176.41,4037.81) 4225.06,3989.15 cw(c4176.41,4037.81) 4176.41,3969
  Bottom Layer w30: S1.2@4230.36,3983.85 ccw(c4194.51,4019.7) 4245.21,4019.7 ccw(c4295.91,4019.7) S1.2@4260.06,3983.85 ; S1.3@4230.36,4197.15 cw(c4194.51,4161.3) 4245.21,4161.3 cw(c4295.91,4161.3) S1.3@4260.06,4197.15 ; S1.2@4245.21,3969 S1.3@4245.21,4212
M35STATUS: M1.12 U19.33 | length 1381
  Top Layer w10: U19.33@3789.61,2304.72 3837.72,2304.72 v1(3853,2320) ; v1(4469,2568) M1.12@4593.83,2568 ; 3837.73,2304.73 cw(c3850.69,2291.76) 3852.18,2310.03 ccw(c3850.69,2291.76) 3837.73,2304.73 ; 3837.73,2304.73 ccw(c3824.76,2317.69) 3843.03,2319.18 cw(c3824.76,2317.69) 3837.73,2304.73 ; 4493.14,2568 cw(c4493.14,2592.14) 4476.07,2575.07 ccw(c4493.14,2592.14) 4493.14,2568 ; 4493.14,2568 ccw(c4493.14,2543.86) 4476.07,2560.93 cw(c4493.14,2543.86) 4493.14,2568 ; 4536.61,2568 cw(c4536.61,2541.61) 4555.28,2560.27 ccw(c4536.61,2541.61) 4536.61,2568 ; 4540.61,2568 ccw(c4540.61,2588.75) 4555.28,2574.08 cw(c4540.61,2588.75) 4540.61,2568
  Bottom Layer w10: v1(3853,2320) 4190,2320 4240,2370 4446,2370 4469,2393 v1(4469,2568) ; 3877.14,2320 cw(c3877.14,2344.14) 3860.07,2327.07 ccw(c3877.14,2344.14) 3877.14,2320 ; 3877.14,2320 ccw(c3877.14,2295.86) 3860.07,2312.93 cw(c3877.14,2295.86) 3877.14,2320 ; 4469,2543.86 cw(c4493.14,2543.86) 4476.07,2560.93 ccw(c4493.14,2543.86) 4469,2543.86 ; 4469,2543.86 ccw(c4444.86,2543.86) 4461.93,2560.93 cw(c4444.86,2543.86) 4469,2543.86
NetBT1_1: BT1.1 D19.1 | length 928.8
  Top Layer w15: D19.1@1689.21,2000 1689.21,2183.21 1709.21,2203.21 BT1.1@1709.21,2310 ; 1689.21,2025.35 cw(c1663.86,2025.35) 1681.79,2007.42 ccw(c1663.86,2025.35) 1689.21,2025.35 ; 1689.21,2025.35 ccw(c1714.56,2025.35) 1696.64,2007.42 cw(c1714.56,2025.35) 1689.21,2025.35 ; 1709.21,2207.4 cw(c1811.82,2207.4) 1739.26,2279.95 ccw(c1811.82,2207.4) 1709.21,2207.4 ; 1709.21,2207.4 ccw(c1606.61,2207.4) 1679.16,2279.95 cw(c1606.61,2207.4) 1709.21,2207.4 ; 1709.21,2243.61 cw(c1775.6,2243.61) 1728.66,2290.55 ccw(c1775.6,2243.61) 1709.21,2243.61 ; 1709.21,2243.61 ccw(c1642.82,2243.61) 1689.77,2290.55 cw(c1642.82,2243.61) 1709.21,2243.61
NetC1_2: C1.2 R1.1 R5.1 U1.4 | length 1239.5
  Top Layer w20: R5.1@4544.21,465 R1.1@4544.21,625 4605.21,625 4650.21,580 4832.21,580 4847.6,595.39 U1.4@4847.6,705 ; 4544.21,501.21 cw(c4508,501.21) 4533.61,475.61 ccw(c4508,501.21) 4544.21,501.21 ; 4544.21,501.21 ccw(c4580.43,501.21) 4554.82,475.61 cw(c4580.43,501.21) 4544.21,501.21 ; 4544.21,508.79 cw(c4580.43,508.79) 4554.82,534.39 ccw(c4580.43,508.79) 4544.21,508.79 ; 4544.21,508.79 ccw(c4508,508.79) 4533.61,534.39 cw(c4508,508.79) 4544.21,508.79 ; 4544.21,581.21 cw(c4508,581.21) 4533.61,555.61 ccw(c4508,581.21) 4544.21,581.21 ; 4544.21,581.21 ccw(c4580.43,581.21) 4554.82,555.61 cw(c4580.43,581.21) 4544.21,581.21 ; 4544.21,588.79 cw(c4580.43,588.79) 4554.82,614.39 ccw(c4580.43,588.79) 4544.21,588.79 ; 4544.21,588.79 ccw(c4508,588.79) 4533.61,614.39 cw(c4508,588.79) 4544.21,588.79 ; 4582.93,625 cw(c4582.93,661.21) 4557.32,635.61 ccw(c4582.93,661.21) 4582.93,625 ; 4582.93,625 ccw(c4582.93,588.79) 4557.32,614.39 cw(c4582.93,588.79) 4582.93,625 ; 4847.6,641.45 cw(c4870.73,641.45) 4854.38,657.81 ccw(c4870.73,641.45) 4847.6,641.45 ; 4847.6,641.45 ccw(c4824.46,641.45) 4840.82,657.81 cw(c4824.46,641.45) 4847.6,641.45
NetC4_1: C4.1 C6.1 U2.2 | length 965.2
  Top Layer w15: C6.1@1020.21,2910.61 C4.1@1020.21,2830.61 1135.6,2830.61 1154.21,2812 1154.21,2555.61 1144.8,2546.2 U2.2@1069.21,2546.2 ; 1020.21,2868.37 cw(c1062.46,2868.37) 1032.59,2898.24 ccw(c1062.46,2868.37) 1020.21,2868.37 ; 1020.21,2868.37 ccw(c977.96,2868.37) 1007.84,2898.24 cw(c977.96,2868.37) 1020.21,2868.37 ; 1020.21,2872.86 cw(c977.96,2872.86) 1007.84,2842.99 ccw(c977.96,2872.86) 1020.21,2872.86 ; 1020.21,2872.86 ccw(c1062.46,2872.86) 1032.59,2842.99 cw(c1062.46,2872.86) 1020.21,2872.86 ; 1064.96,2830.61 cw(c1064.96,2872.86) 1035.09,2842.99 ccw(c1064.96,2872.86) 1064.96,2830.61 ; 1064.96,2830.61 ccw(c1064.96,2788.37) 1035.09,2818.24 cw(c1064.96,2788.37) 1064.96,2830.61
NetC4_2: C4.2 R9.2 | length 553.3
  Top Layer w15: R9.2@924.21,2990.61 864.83,2990.61 855.21,2981 855.21,2840 864.6,2830.61 C4.2@925.21,2830.61 ; 879.46,2990.61 cw(c879.46,2948.37) 909.34,2978.24 ccw(c879.46,2948.37) 879.46,2990.61 ; 879.46,2990.61 ccw(c879.46,3032.86) 909.34,3002.99 cw(c879.46,3032.86) 879.46,2990.61 ; 880.46,2830.61 cw(c880.46,2788.37) 910.34,2818.24 ccw(c880.46,2788.37) 880.46,2830.61 ; 880.46,2830.61 ccw(c880.46,2872.86) 910.34,2842.99 cw(c880.46,2872.86) 880.46,2830.61
NetC7_1: C7.1 Q1.3 R3.2 R8.2 | length 742.9
  Top Layer w30: Q1.3@468.31,2036.72 770.93,2036.72 846.83,2112.61 R8.2@929.21,2112.61 R3.2@929.21,2276.61 ; C7.1@921.14,2187.54 cw(c901.66,2168.06) 929.21,2168.06 ccw(c901.66,2168.06) C7.1@921.14,2187.54 ; C7.1@921.14,2201.69 ccw(c901.66,2221.17) 929.21,2221.17 cw(c901.66,2221.17) C7.1@921.14,2201.69
NetC17_1: C17.1 L4.2 R20.1 | length 951.4
  Top Layer w15: C17.1@3527.6,1500 R20.1@3527.6,1580 ; 3527.6,1537.75 cw(c3569.85,1537.75) 3539.97,1567.63 ccw(c3569.85,1537.75) 3527.6,1537.75 ; 3527.6,1537.75 ccw(c3485.35,1537.75) 3515.22,1567.63 cw(c3485.35,1537.75) 3527.6,1537.75 ; 3527.6,1542.25 cw(c3485.35,1542.25) 3515.22,1512.37 ccw(c3485.35,1542.25) 3527.6,1542.25 ; 3527.6,1542.25 ccw(c3569.85,1542.25) 3539.97,1512.37 cw(c3569.85,1542.25) 3527.6,1542.25
  Top Layer w20: C17.1@3527.6,1500 3775,1500 3801.57,1473.43 L4.2@3801.57,1380 ; 3566.31,1500 cw(c3566.31,1536.21) 3540.71,1510.61 ccw(c3566.31,1536.21) 3566.31,1500 ; 3566.31,1500 ccw(c3566.31,1463.79) 3540.71,1489.39 cw(c3566.31,1463.79) 3566.31,1500 ; 3801.57,1426.21 cw(c3765.36,1426.21) 3790.97,1400.61 ccw(c3765.36,1426.21) 3801.57,1426.21 ; 3801.57,1426.21 ccw(c3837.79,1426.21) 3812.18,1400.61 cw(c3837.79,1426.21) 3801.57,1426.21
NetC18_1: C18.1 L4.1 R21.1 | length 1187.3
  Top Layer w15: R21.1@3527.6,1660 C18.1@3527.6,1740 ; 3527.6,1697.75 cw(c3569.85,1697.75) 3539.97,1727.63 ccw(c3569.85,1697.75) 3527.6,1697.75 ; 3527.6,1697.75 ccw(c3485.35,1697.75) 3515.22,1727.63 cw(c3485.35,1697.75) 3527.6,1697.75 ; 3527.6,1702.25 cw(c3485.35,1702.25) 3515.22,1672.37 ccw(c3485.35,1702.25) 3527.6,1702.25 ; 3527.6,1702.25 ccw(c3569.85,1702.25) 3539.97,1672.37 cw(c3569.85,1702.25) 3527.6,1702.25
  Top Layer w20: R21.1@3527.6,1660 3602,1660 3620,1642 3620,1562 3641,1541 3874,1541 3900,1515 L4.1@3900,1380 ; 3566.31,1660 cw(c3566.31,1696.21) 3540.71,1670.61 ccw(c3566.31,1696.21) 3566.31,1660 ; 3566.31,1660 ccw(c3566.31,1623.79) 3540.71,1649.39 cw(c3566.31,1623.79) 3566.31,1660 ; 3900,1426.21 cw(c3863.79,1426.21) 3889.39,1400.61 ccw(c3863.79,1426.21) 3900,1426.21 ; 3900,1426.21 ccw(c3936.21,1426.21) 3910.61,1400.61 cw(c3936.21,1426.21) 3900,1426.21
NetC21_1: C21.1 U13.1 | length 892.7
  Top Layer w12: C21.1@492.71,3329 492.71,3251.5 504.21,3240 869.21,3240 879.21,3250 879.21,3455 869.21,3465 U13.1@812.71,3465 ; 492.71,3280.63 cw(c538.58,3280.63) 506.15,3313.06 ccw(c538.58,3280.63) 492.71,3280.63 ; 492.71,3280.63 ccw(c446.84,3280.63) 479.28,3313.06 cw(c446.84,3280.63) 492.71,3280.63